# Altium PCB pcb-4layer-1oz-1.6mm.PcbDoc
Units mm, origin at the board's own origin, x right, y up, seen from the top; angles counter-clockwise.
Board outline 50 x 50 mm, 4 copper layers (Top Layer, L2 (GND), L3 (PWR), Bottom Layer), stack 1.506 mm thick; 65 components, 45 nets, 244 pads, 115 vias.
Unrouted connection lines stored in the file: 1.
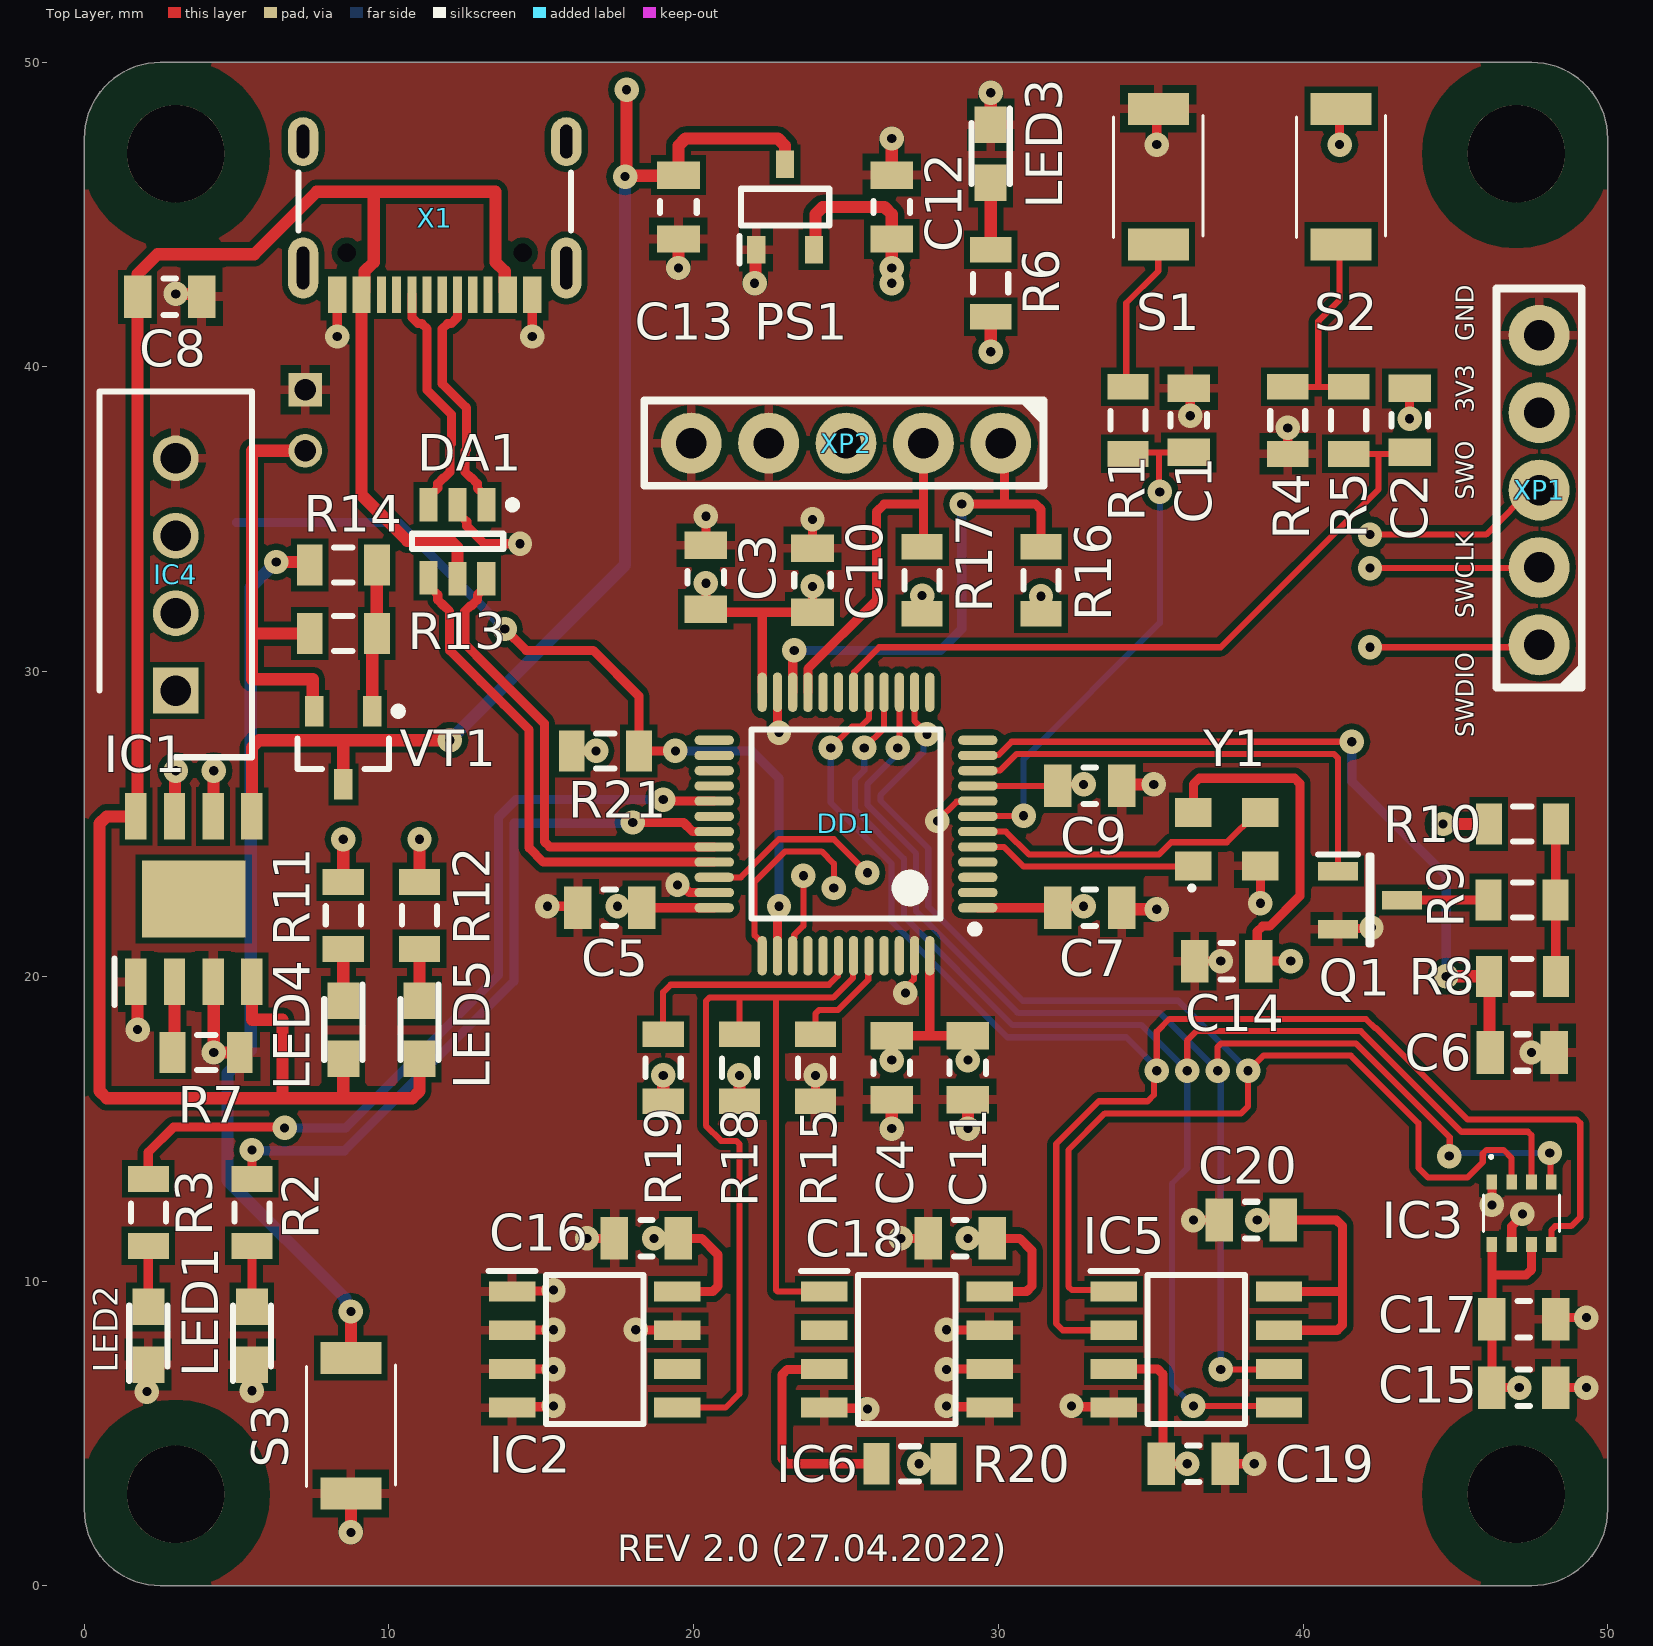
[diagram p0: Top Layer view]
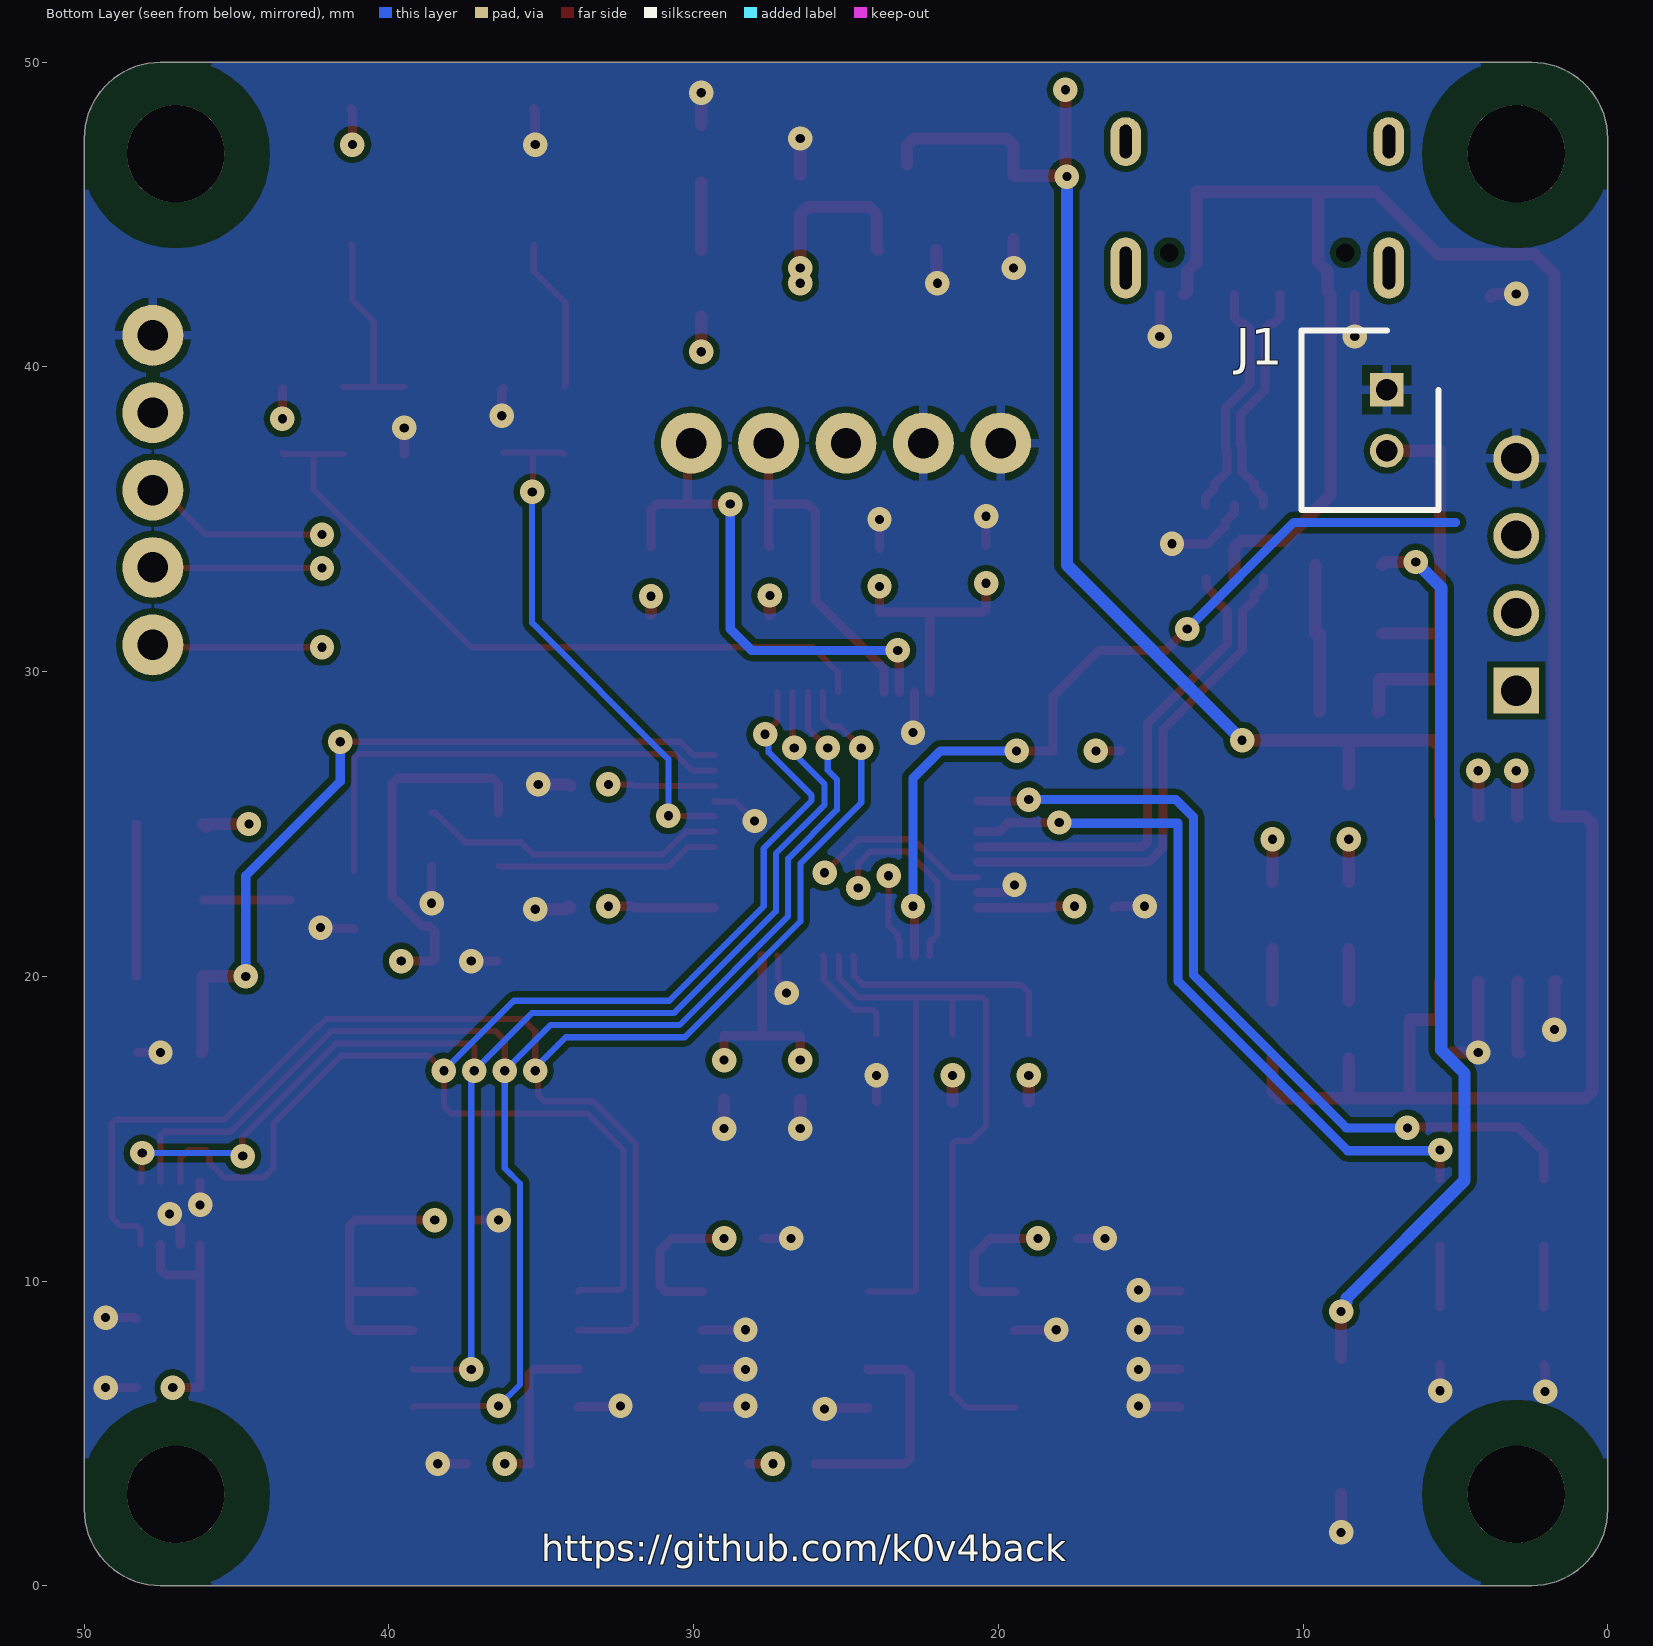
[diagram p1: Bottom Layer view, seen from below]
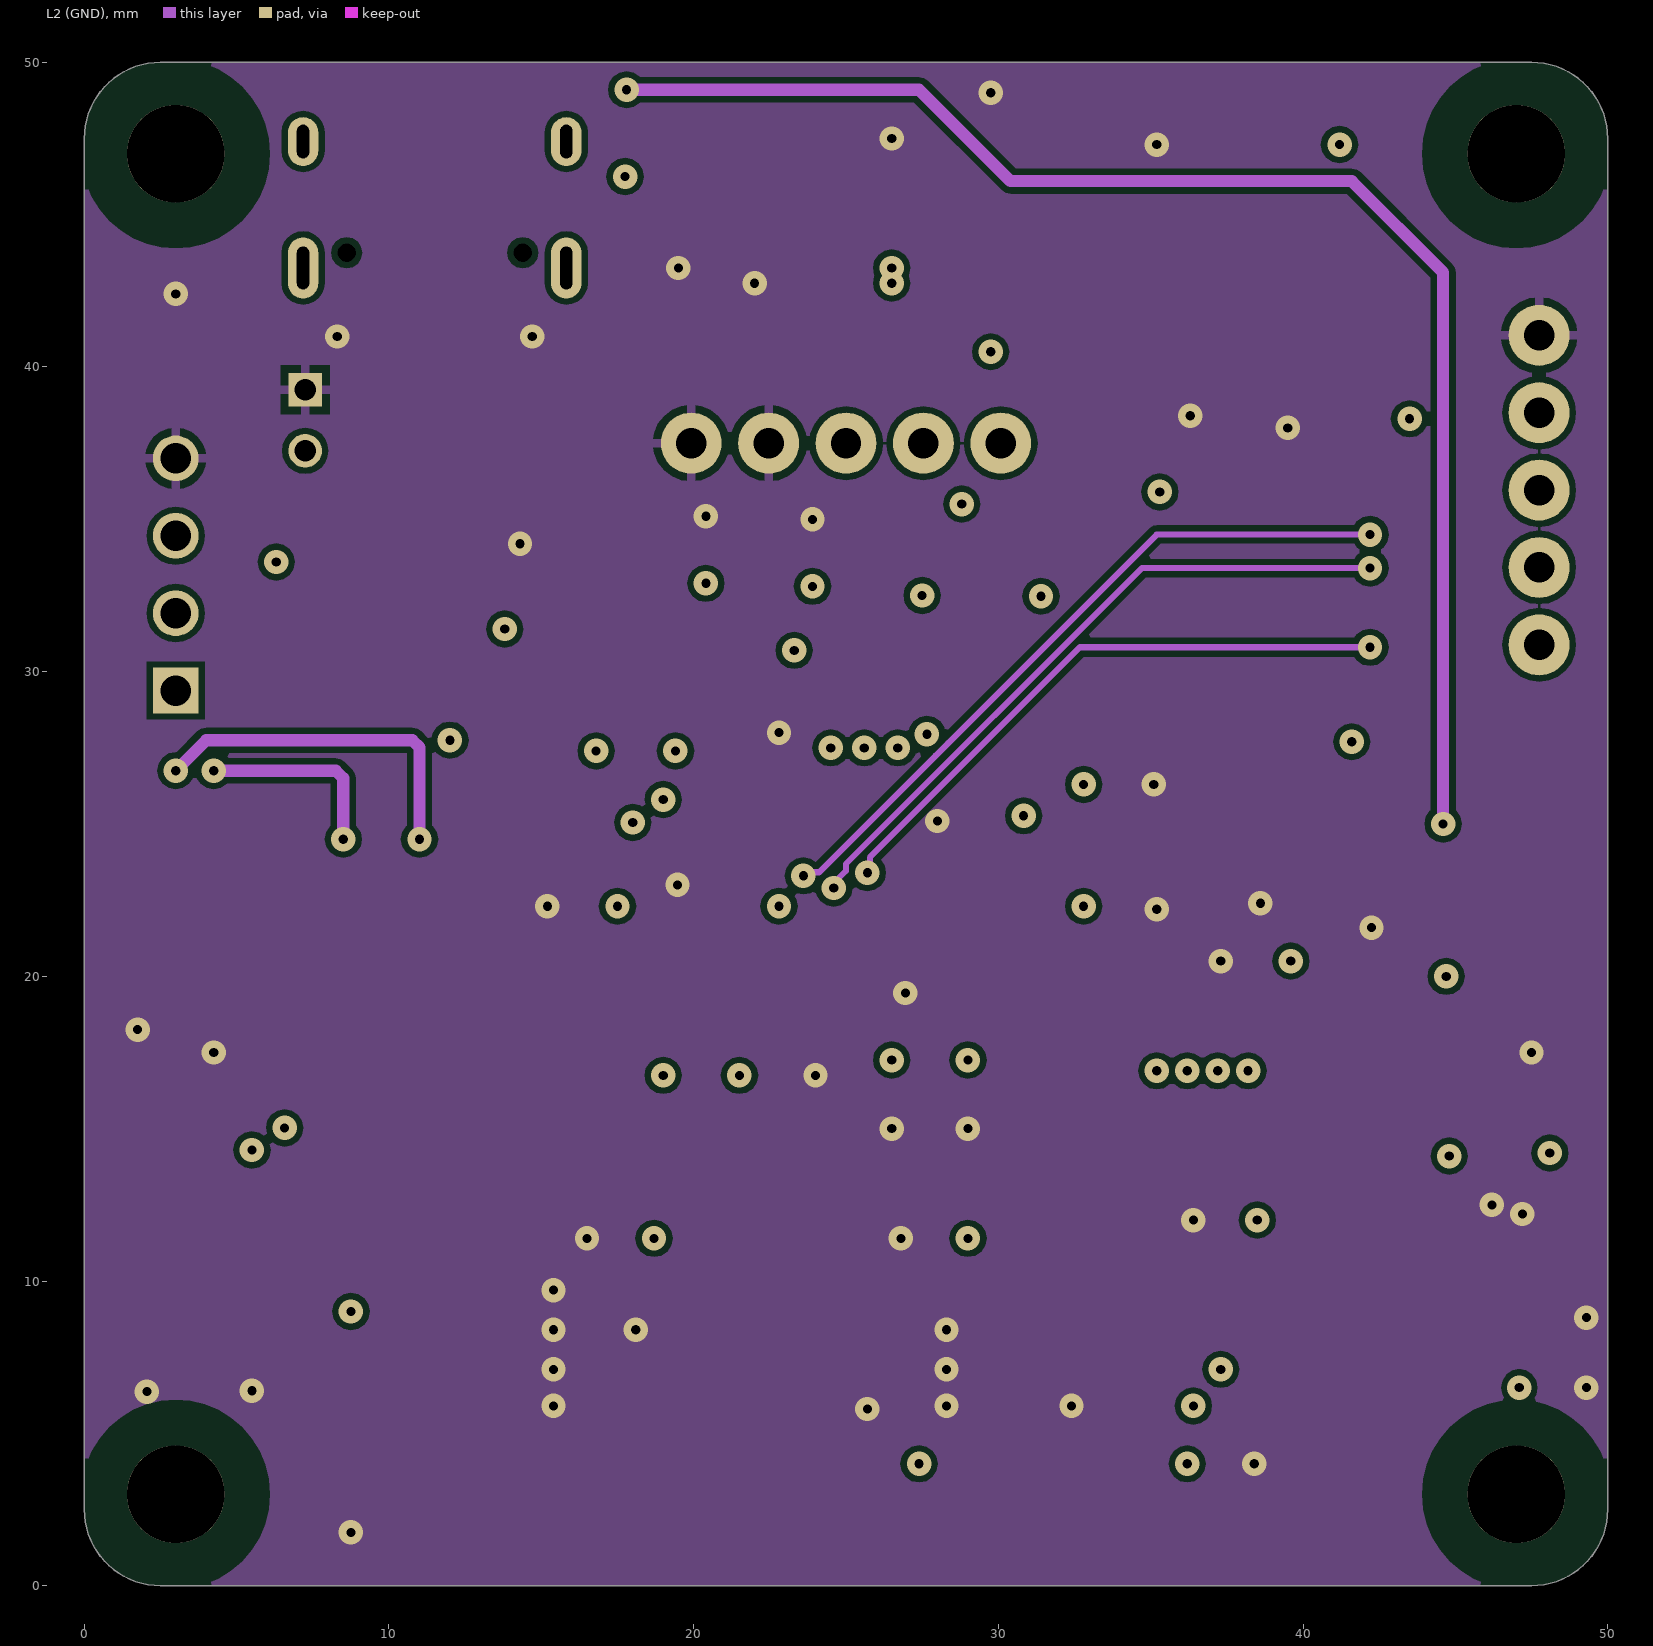
[diagram p2: L2 (GND)]
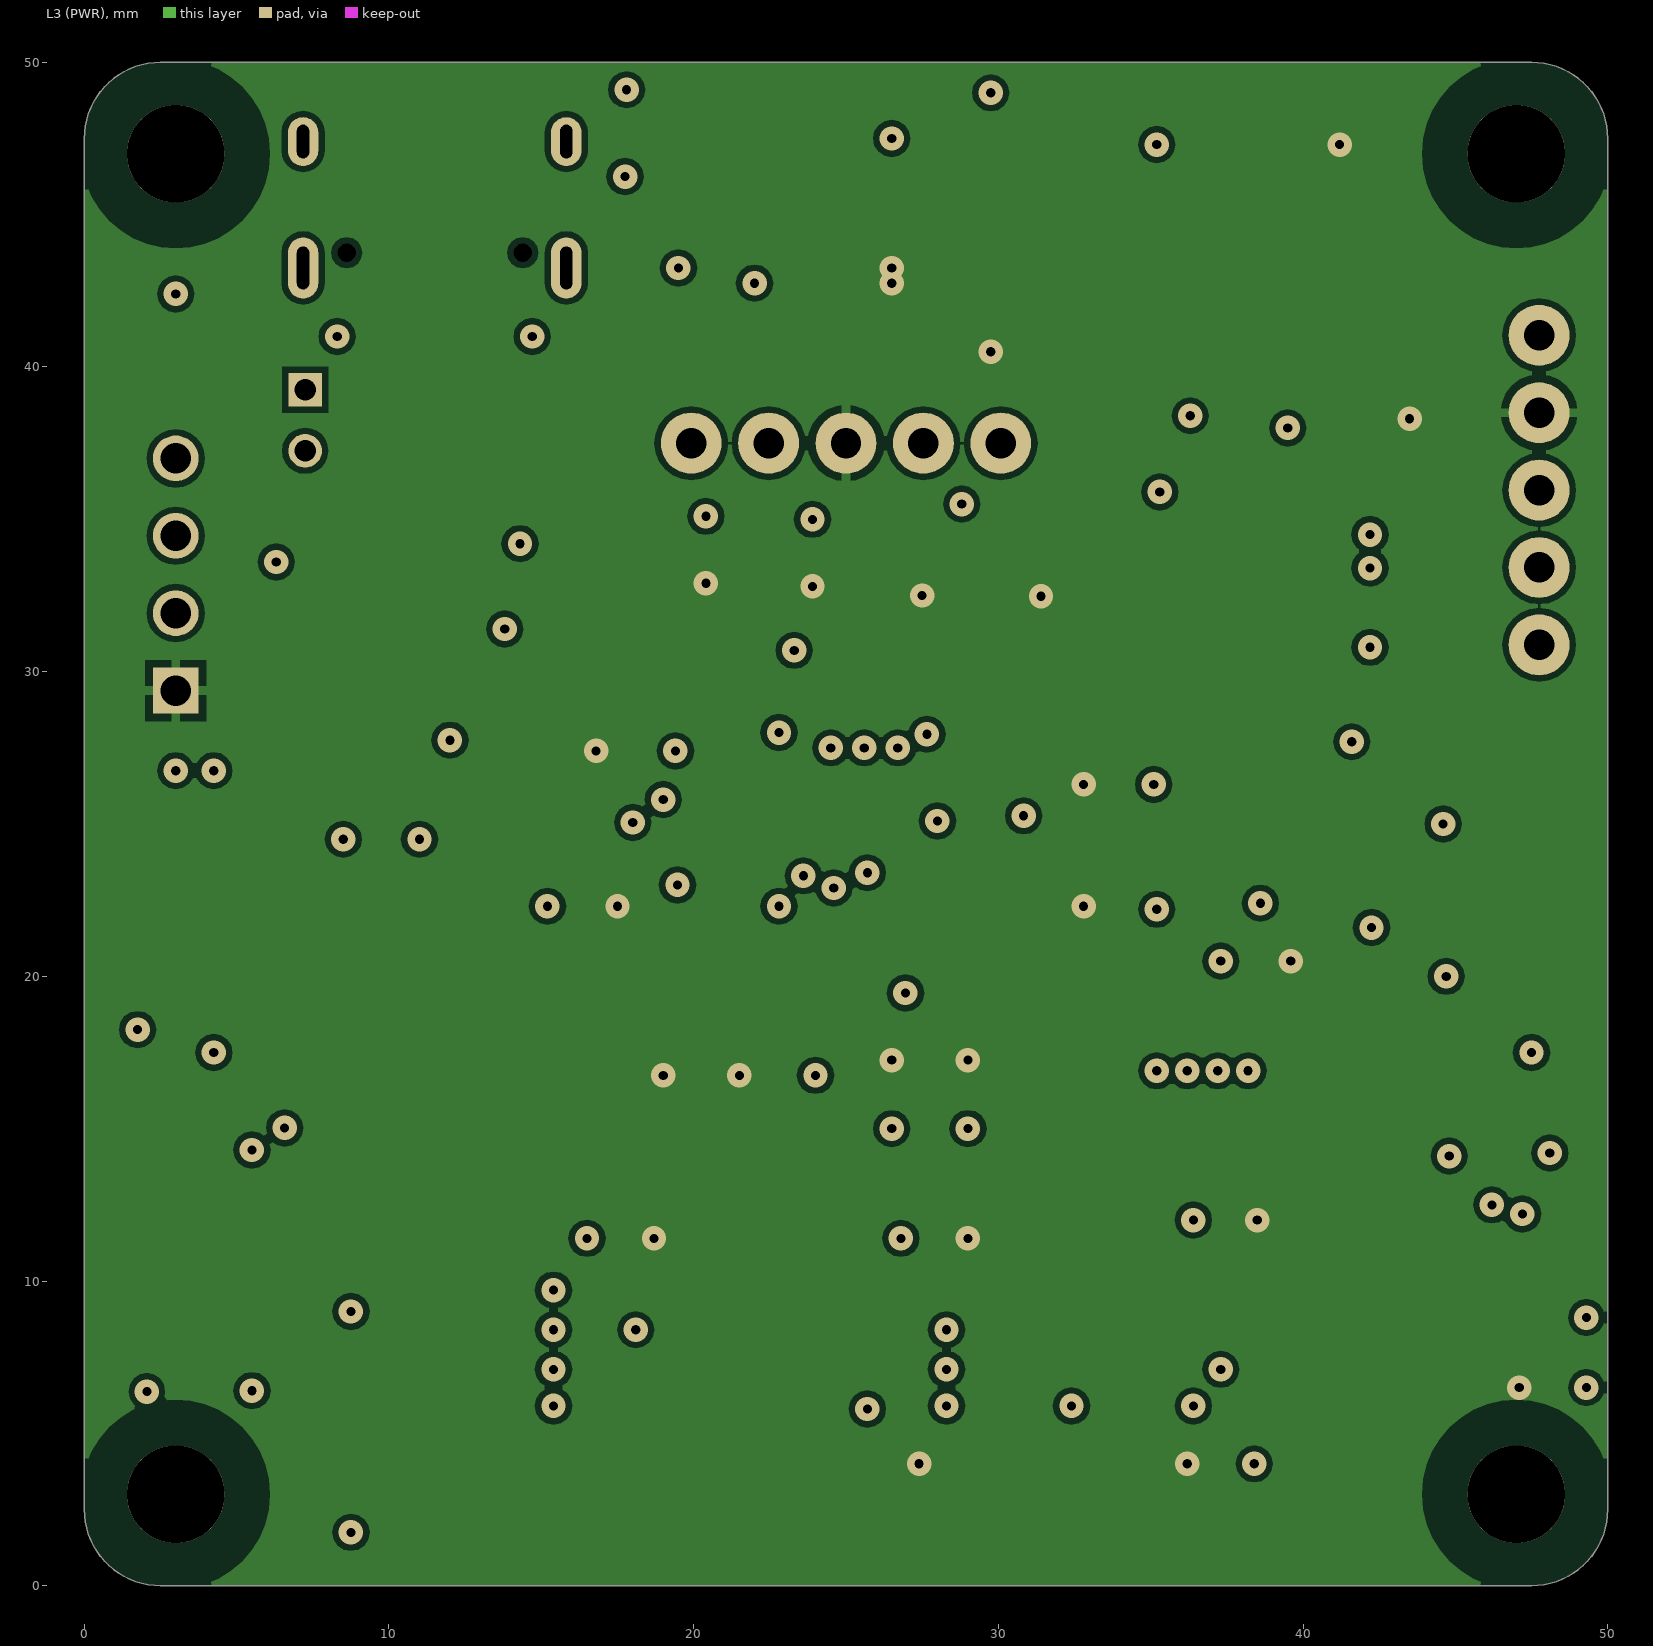
[diagram p3: L3 (PWR)]

## Layer stack, top to bottom
Top Solder: solder mask 0.01, Solder Resist, Dk 3.5
Top Layer: signal copper 0.035
Dielectric 2: prepreg 0.2, PP-006, Dk 4.1
L2 (GND): signal copper 0.0178
Dielectric 1: dielectric 1, FR-4, Dk 4.8
L3 (PWR): signal copper 0.0178
Dielectric 3: prepreg 0.2, PP-006, Dk 4.1
Bottom Layer: signal copper 0.035
Bottom Solder: solder mask 0.01, Solder Resist, Dk 3.5

## Board outline
2.5,0 cw(c2.5,2.5) 0,2.5 0,47.5 cw(c2.5,47.5) 2.5,50 47.5,50 cw(c47.5,47.5) 50,47.5 50,2.5 cw(c47.5,2.5) 47.5,0

## Design rules (kind name [scope] priority, off if disabled: settings)
Clearance Clearance_MH [IsPad and (not PadIsPlated) and (not InAnyComponent)] p1: gap=1.5 ignorepadtopadclearanceinfootprint=FALSE
Clearance [All] p2: gap=0.2 ignorepadtopadclearanceinfootprint=FALSE
DiffPairsRouting [All] p1: maxlimit=0.254 minlimit=0.2 mostfreqgap=0.254 toplayer_maxgap=0.2 toplayer_prefgap=0.2 toplayer_minwidth=0.3 toplayer_maxwidth=0.3 toplayer_prefwidth=0.3 bottomlayer_maxgap=0.2 bottomlayer_prefgap=0.2 bottomlayer_minwidth=0.3 bottomlayer_maxwidth=0.3 bottomlayer_prefwidth=0.3 impedanceprofiledriven=TRUE impedanceprofileid={7B1C8558-1568-4EE4-90A3-14166FB62CFF} impedanceprofilevalue=90.000000 maxuncoupledlength=12.7
HoleSize HoleSize_PWR [All] p1: absolutevalues=TRUE maxlimit=999 minlimit=0.5 maxpercent=80.000 minpercent=20.000
HoleSize [All] p2: absolutevalues=TRUE maxlimit=999 minlimit=0.3 maxpercent=80.000 minpercent=20.000
HoleToHoleClearance [All] p1: gap=0.2 allowstackedmicrovias=TRUE
MinimumSolderMaskSliver [All] p1: minsoldermaskwidth=0.2
PlaneConnect PlaneConnect_PWR [IsVia] p1: planeconnectstyle=Direct reliefexpansion=0.508 reliefentries=4 reliefconductorwidth=0.254 reliefairgap=0.254
PlaneConnect [All] p2: planeconnectstyle=Relief reliefexpansion=0.5 reliefentries=4 reliefconductorwidth=0.5 reliefairgap=0.3
PolygonConnect PolygonConnect_Via [IsVia] p1: connectstyle=Direct reliefconductorwidth=0.254 reliefentries=4 polygonreliefangle="90 Angle" airgapwidth=0.254
PolygonConnect [All] p2: connectstyle=Relief reliefconductorwidth=0.3 reliefentries=4 polygonreliefangle="90 Angle" airgapwidth=0.25
RoomDefinition Main [InComponentClass('Main')] p1: confinementstyle=ConfineIn formatcopy=TRUE lockcomponents=FALSE outline 101.1,53.5 193.1,53.5 193.1,70.5 101.1,70.5
RoomDefinition B4 [InComponentClass('B4')] p2: confinementstyle=ConfineIn formatcopy=TRUE lockcomponents=FALSE outline 101,46 106,46 106,53 101,53
RoomDefinition B3 [InComponentClass('B3')] p3: confinementstyle=ConfineIn formatcopy=TRUE lockcomponents=FALSE outline 79,29.1 171,29.1 171,46.1 79,46.1
RoomDefinition B2 [InComponentClass('B2')] p4: confinementstyle=ConfineIn formatcopy=TRUE lockcomponents=FALSE outline 101,16.5 261.499,16.5 261.499,27.5 101,27.5
RoomDefinition B1 [InComponentClass('B1')] p5: confinementstyle=ConfineIn formatcopy=TRUE lockcomponents=FALSE outline 101.5,-15 137,-15 137,15.5 101.5,15.5
RoutingVias [All] p1: holewidth=0.3 width=0.8 viastyle="Through Hole" minholewidth=0.3 minwidth=0.8 maxholewidth=0.3 maxwidth=0.8
RoutingVias RoutingVias_PWR [All] p2: holewidth=0.5 width=1 viastyle="Through Hole" minholewidth=0.5 minwidth=1 maxholewidth=0.5 maxwidth=1
SilkToSolderMaskClearance [IsPad vs IsVia] p1: minsilkscreentomaskgap=0.254 clearancetoexposedcopper=TRUE
SolderMaskExpansion SolderMaskExpansion_Via [IsVia and not InAnyComponent] p1: expansion=0.102 istentingtop=TRUE
SolderMaskExpansion [All] p2: expansion=0 istentingtop=FALSE
Width [All] p1: maxlimit=0.4 minlimit=0.2 preferedwidth=0.3
24 further rules are at their usual default settings.

## Classes and differential pairs
net class PWR: 3V3 5V ADC1_IN1 ADC_UP BAT BAT_OUT GND NetIC1_2 NetIC1_6 NetIC1_7 NetIC1_9 NetIC6_3 NetLED4_1 NetLED5_1 NetQ1_3 NetR8_1 NetR13_1 NetR14_1 NetVT2_1
component class Main: C1 C2 J1 LED1 LED2 LED3 R1 R2 R3 R4 R5 R6 S1 S2 X1 XP1 XP2
component class B4: DA1
component class B3: C15 C16 C17 C18 C19 C20 IC2 IC3 IC4 IC5 IC6 R16 R17 R18 R19 R20 R21
component class B2: C3 C4 C5 C6 C7 C8 C9 C10 C11 C12 C13 IC1 LED4 LED5 PS1 Q1 R7 R8 R9 R10 R11 R12 R13 R14 S3 VT1
component class B1: C14 DD1 R15 Y1
differential pair USB_OUT: +USB_OUT_P -USB_OUT_N
differential pair USB_IN: +USB_IN_P -USB_IN_N

## Components (designator, comment, footprint, x,y, rotation, side; value= is the part's Value field where it differs from the comment)
C1 "0.1 uF" C_0805 36.25,38.25 r270 top value=100nF
C2 "0.1 uF" C_0805 43.5,38.25 r90 top value=100nF
C3 "10 uF" C_0805 20.4,33.1 r270 top value=10mF
C4 "0.1 uF" C_0805 26.5,17 r90 top value=100nF
C5 "10 uF" C_0805 17.25,22.25 r0 top value=10mF
C6 "1 uF" C_0805 47.2,17.5 r180 top value=100nF
C7 "0.1 uF" C_0805 33,22.25 r180 top value=100nF
C8 "10 uF" C_0805 2.8,42.3 r180 top
C9 "0.1 uF" C_0805 33,26.25 r180 top value=100nF
C10 "0.1 uF" C_0805 23.9,33 r270 top value=100nF
C11 "0.1 uF" C_0805 29,17 r90 top value=100nF
C12 "10 uF" C_0805 26.5,45.25 r90 top
C13 "10 uF" C_0805 19.5,45.25 r270 top
C14 "0.1 uF" C_0805 37.5,20.5 r0 top value=1mF
C15 "1 uF" C_0805 47.25,6.5 r180 top value=1mF
C16 "1mF" C_0805 18.45,11.4 r0 top
C17 "0.1 uF" C_0805 47.25,8.75 r180 top value=1mF
C18 "22 uF" C_0805 28.75,11.4 r0 top value=22mF
C19 "1mF" C_0805 36.4,4 r180 top
C20 "1mF" C_0805 38.3,12 r0 top
DA1 "USBLC6-2SC6" SOT-23-6 12.25,34.25 r270 top
DD1 "STM32f103c8t6" LQFP48 25,25 r180 top
IC1 "TP4056A" SOIC127P600X175-9N 3.595,22.538 r90 top
IC2 "24LC32A-I_SN" SOIC127P600X175-8N 16.75,7.75 r0 top
IC3 "MOD-BME280" MODBME280 47.175,12.225 r90 top
IC4 "DH11" HDRV4W80P0X254_1X4_1200X500X1550P 3,29.38 r90 top
IC5 "W25X40CLSNIG" SOIC127P600X175-8N 36.5,7.75 r0 top
IC6 "LM75AD,118" SOIC127P600X175-8N 27,7.75 r0 top
J1 "B2B-PH-K-S_LF__SN_" SHDR2W50P0X200_1X2_590X450X600P 7.25,39.25 r90 bottom
LED1 "150080GS75000" LEDM2012X80N 5.5,8.2 r90 top
LED2 "150080GS75000" LEDM2012X80N 2.1,8.2 r90 top
LED3 "150080GS75000" LEDM2012X80N 29.75,47 r270 top
LED4 "150080GS75000" LEDM2012X80N 8.5,18.25 r270 top
LED5 "150080GS75000" LEDM2012X80N 11,18.25 r270 top
PS1 "XC6206P182MR" SOT95P280X130-3N 23,45.25 r90 top
Q1 "IRLML2502TRPBF" SOT95P237X112-3N 42.2,22.5 r0 top
R1 "10 kOm" R_0805 34.25,38.25 r90 top
R2 "2 kOm" R_0805 5.501,12.25 r270 top value="510 Om"
R3 "2 kOm" R_0805 2.101,12.25 r270 top value="510 Om"
R4 "100 kOm" R_0805 39.5,38.25 r270 top value="10 kOm"
R5 "10 kOm" R_0805 41.5,38.25 r90 top
R6 "2 kOm" R_0805 29.75,42.75 r90 top
R7 "1 кOm" R_0805 4,17.5 r0 top
R8 "100 Om" R_0805 47.2,20 r180 top value="47 kOm"
R9 "110 kOm" R_0805 47.192,22.5 r0 top value="10 kOm"
R10 "30 kOm" R_0805 47.2,25 r180 top value="510 kOm"
R11 "1 кOm" R_0805 8.5,22 r90 top
R12 "1 кOm" R_0805 11,22 r90 top
R13 "100 kOm" R_0805 8.5,31.25 r180 top value="10 kOm"
R14 "10 kOm" R_0805 8.5,33.5 r0 top
R15 "10 kOm" R_0805 24,17 r90 top
R16 "10 kOm" R_0805 31.4,33 r90 top
R17 "10 kOm" R_0805 27.5,33 r90 top
R18 "10 kOm" R_0805 21.5,17 r90 top
R19 "10 kOm" R_0805 19,17 r90 top
R20 "10 kOm" R_0805 27.1,4 r180 top
R21 "10 kOm" R_0805 17.1,27.4 r0 top
S1 "TS-1088R-02026" TS1088R02026 35.25,46.25 r270 top
S2 "TS-1088R-02026" TS1088R02026 41.25,46.25 r90 top
S3 "TS-1088R-02026" TS1088R02026 8.75,5.25 r270 top
VT1 "IRLML5203TRPBF" SOT23 8.5,27.5 r270 top
X1 "USB Type C, 3A" "CON: TYPE-C-31-M-12" 11.5,43.75 r0 top
XP1 "PBS-5" PBS-5 47.75,30.88 r90 top
XP2 "PBS-5" PBS-5 30.08,37.5 r180 top
Y1 "S3D8.000000B20F30T" S3D8000000B20F30T 37.5,24.5 r0 top

## Footprints (in the part's own frame and the unit in brackets; to place one, negate y for a bottom-side part, rotate by r counter-clockwise, add the part's x,y. Pads: shape width x height; smd on the part's side, far side on the other; paste and mask are expansions set on the pad)
C_0805 [mm] "Chip Capacitor, 2-Leads, Body 2,00x1,25mm, IPC Medium Density"
  rect 0.9x1.4 smd: 1(-1.05,0) 2(1.05,0)
  silkscreen extent -0.2,-0.6 0.2,0.6, body extent -1,-0.62 1,0.63, height 0.8
"CON: TYPE-C-31-M-12" [mm]
  rect 0.6x1.2 smd mask+0.075: A1(3.2,-1.375) A4(2.4,-1.375) B1(-3.2,-1.375) B4(-2.4,-1.375)
  rect 0.3x1.2 smd mask+0.075: A5(1.25,-1.375) A6(0.25,-1.375) A7(-0.25,-1.375) A8(-1.25,-1.375) B5(-1.75,-1.375) B6(-0.75,-1.375) B7(0.75,-1.375) B8(1.75,-1.375)
  oval 1x2 hole 0.4 slot 1.4 at 90 deg mask+0.075: MH(-4.32,-0.5) MH(4.32,-0.5)
  oval 1x1.6 hole 0.4 slot 1.1 at 90 deg mask+0.075: MH(-4.32,3.65) MH(4.32,3.65)
  round 0 hole 0.6 mask+0.075: MH(-2.89,0) MH(2.89,0)
  silkscreen extent -4.47,0.72 4.47,2.63, body extent -4.48,-1.48 4.48,6.28, height 3.26
HDRV4W80P0X254_1X4_1200X500X1550P [mm]
  rect 1.5x1.5 hole 1: 1(0,0)
  round 1.5 hole 1: 2(2.54,0) 3(5.08,0) 4(7.62,0)
  silkscreen extent -2.19,-2.5 9.81,2.5
LEDM2012X80N [mm]
  rect 1.2x1.05 smd: 1(-0.95,0) 2(0.95,0)
  silkscreen extent -1.48,-0.63 1,0.63, body extent -1,-0.63 1,0.63, height 0.7
LQFP48 [mm] "TSQFP, 48-Leads, Body 7,00x7,00mm, Pitch 0,50mm, IPC Medium Density"
  oval 1.3x0.3 smd: 1(-4.325,2.75) 2(-4.325,2.25) 3(-4.325,1.75) 4(-4.325,1.25) 5(-4.325,0.75) 6(-4.325,0.25) 7(-4.325,-0.25) 8(-4.325,-0.75) 9(-4.325,-1.25) 10(-4.325,-1.75) 11(-4.325,-2.25) 12(-4.325,-2.75) 25(4.325,-2.75) 26(4.325,-2.25) 27(4.325,-1.75) 28(4.325,-1.25) 29(4.325,-0.75) 30(4.325,-0.25) 31(4.325,0.25) 32(4.325,0.75) 33(4.325,1.25) 34(4.325,1.75) 35(4.325,2.25) 36(4.325,2.75)
  oval 0.3x1.3 smd: 13(-2.75,-4.325) 14(-2.25,-4.325) 15(-1.75,-4.325) 16(-1.25,-4.325) 17(-0.75,-4.325) 18(-0.25,-4.325) 19(0.25,-4.325) 20(0.75,-4.325) 21(1.25,-4.325) 22(1.75,-4.325) 23(2.25,-4.325) 24(2.75,-4.325) 37(2.75,4.325) 38(2.25,4.325) 39(1.75,4.325) 40(1.25,4.325) 41(0.75,4.325) 42(0.25,4.325) 43(-0.25,4.325) 44(-0.75,4.325) 45(-1.25,4.325) 46(-1.75,4.325) 47(-2.25,4.325) 48(-2.75,4.325)
  silkscreen extent -4.35,-3.1 3.1,3.57, body extent -4.53,-4.53 4.47,4.47, height 1.5
MODBME280 [mm]
  rect 0.5x0.35 smd: 1(1.025,0.975) 2(1.025,0.325) 3(1.025,-0.325) 4(1.025,-0.975) 5(-1.025,-0.975) 6(-1.025,-0.325) 7(-1.025,0.325) 8(-1.025,0.975)
  silkscreen extent -0.6,-1.25 1.9,1.25, body extent -1.25,-1.25 1.25,1.25, height 0.93
PBS-5 [mm]
  round 2 hole 1: 1(0,0) 2(2.54,0) 3(5.08,0) 4(7.62,0) 5(10.16,0)
  silkscreen extent -1.4,-1.4 11.7,1.4, body extent -1.27,-1.27 11.43,1.27, height 8.5
R_0805 [mm] "Chip Resistor, 2-Leads, Body 2,10x1,30mm, IPC Medium Density"
  rect 0.85x1.35 smd: 1(-1.1,0) 2(1.1,0)
  silkscreen extent -0.3,-0.58 0.3,0.58, body extent -1.2,-0.62 1.2,0.63, height 0.55
S3D8000000B20F30T [mm]
  rect 1.2x0.95 smd: 1(-1.1,-0.875) 2(1.1,-0.875) 3(1.1,0.875) 4(-1.1,0.875)
  silkscreen extent -1.2,-1.65 -1.1,-1.55, body extent -1.61,-1.25 1.61,1.25, height 1.1
SHDR2W50P0X200_1X2_590X450X600P [mm]
  rect 1.1x1.1 hole 0.7: 1(0,0)
  round 1.1 hole 0.7: 2(-2,0)
  silkscreen extent -3.95,-1.7 1.95,2.8, body extent -3.95,-2.25 1.95,2.25, height 6
SOIC127P600X175-8N [mm]
  rect 1.525x0.65 smd: 1(-2.712,1.905) 2(-2.712,0.635) 3(-2.712,-0.635) 4(-2.712,-1.905) 5(2.712,-1.905) 6(2.712,-0.635) 7(2.712,0.635) 8(2.712,1.905)
  silkscreen extent -3.47,-2.45 1.6,2.58, body extent -3,-2.45 3,2.45, height 1.75
SOIC127P600X175-9N [mm]
  rect 1.525x0.7 smd: 1(-2.712,1.905) 2(-2.712,0.635) 3(-2.712,-0.635) 4(-2.712,-1.905) 5(2.712,-1.905) 6(2.712,-0.635) 7(2.712,0.635) 8(2.712,1.905)
  rect 2.513x3.402 smd: 9(0,0)
  silkscreen extent -3.47,2.61 -1.95,2.61, body extent -3,-2.45 3,2.45, height 1.75
SOT23 [mm] "SOT23, 3-Leads, Body 2,90x2,45mm, Pitch 0,95mm, IPC Medium Density"
  rect 1x0.6 smd: 1(-1.2,0.95) 2(-1.2,-0.95) 3(1.2,0)
  silkscreen extent -1.32,-1.5 0.7,1.93, body extent -1.05,-1.5 1.45,1.5, height 1.05
SOT95P237X112-3N [mm]
  rect 1.3x0.6 smd: 1(-1.05,0.95) 2(-1.05,-0.95) 3(1.05,0)
  silkscreen extent -1.7,-1.46 0.05,1.5, body extent -1.18,-1.46 1.18,1.46, height 1.12
SOT95P280X130-3N [mm]
  rect 0.9x0.6 smd: 1(-1.4,0.95) 2(-1.4,-0.95) 3(1.4,0)
  silkscreen extent -1.85,-1.45 0.6,1.5, body extent -1.4,-1.45 1.4,1.45, height 1.3
SOT-23-6 [mm] "SOT23, 6-Leads, Body 1,60x1,60mm, Pitch 0,50mm, IPC Medium Density"
  rect 1.1x0.6 smd: 1(-1.225,0.95) 2(-1.225,0) 3(-1.225,-0.95) 4(1.175,-0.95) 5(1.194,0) 6(1.194,0.94)
  silkscreen extent -1.35,-1.5 0.22,1.93, body extent -1.52,-1.56 1.48,1.49, height 1.4
TS1088R02026 [mm]
  rect 1.05x2 smd: 1(-2.225,0) 2(2.225,0)
  silkscreen extent -2,-1.47 2,1.47, body extent -2.65,-1.47 2.65,1.47, height 2.3

## Part data
C1 C2 C3 C4 C5 C6 C7 C8 C9 C10 C11 C12 C13 C14 C15 C16 C17 C18 C19 C20: library part C_0805
IC1: "Integrated Circuit", Manufacturer_Name=ams, Datasheet Link=https://www.naylampmechatronics.com/img/cms/Datasheets/TC4056A-AMS.pdf, Height=1.75mm, Manufacturer_Part_Number=TP4056A
IC2: "Integrated Circuit", Arrow Part Number=24LC32A-I/SN, Manufacturer_Name=Microchip, Mouser Part Number=579-24LC32A-I/SN, Arrow Price/Stock=https://www.arrow.com/en/products/24lc32a-isn/microchip-technology, Datasheet Link=http://ww1.microchip.com/downloads/en/DeviceDoc/21713M.pdf, Height=1.75mm, Manufacturer_Part_Number=24LC32A-I/SN, Mouser Price/Stock=https://www.mouser.co.uk/ProductDetail/Microchip-Technology/24LC32A-I-SN?qs=KwArPi4cUogiVlLk9E3nOw%3D%3D
IC3: "Integrated Circuit", Manufacturer_Name="Olimex Ltd.", Mouser Part Number=909-MOD-BME280, Datasheet Link=https://eu.mouser.com/datasheet/2/306/BME280-1620794.pdf, Height=1mm, Manufacturer_Part_Number=MOD-BME280, Mouser Price/Stock=https://www.mouser.co.uk/ProductDetail/Olimex-Ltd/MOD-BME280?qs=%252B6g0mu59x7K82sEO3yPPgg%3D%3D
IC4: library part 101020011, "Integrated Circuit", Manufacturer_Name="Seeed Studio", Mouser Part Number=713-101020011, Arrow Part Number=101020011, Arrow Price/Stock=https://www.arrow.com/en/products/101020011/seeed-technology-limited, Datasheet Link=https://componentsearchengine.com/Datasheets/1/101020011.pdf, Height=15.5mm, Manufacturer_Part_Number=101020011, Mouser Price/Stock=https://www.mouser.co.uk/ProductDetail/Seeed-Studio/101020011?qs=1%252B9yuXKSi8Dq%252B99bte6U5Q%3D%3D
IC5: "Integrated Circuit", Manufacturer_Name=Winbond, Mouser Part Number=454-W25X40CLSNIG, Arrow Part Number=W25X40CLSNIG, Arrow Price/Stock=https://www.arrow.com/en/products/w25x40clsnig/winbond-electronics?region=nac, Datasheet Link="https://www.winbond.com/resource-files/w25x40cl_f 20140325.pdf", Height=1.75mm, Manufacturer_Part_Number=W25X40CLSNIG, Mouser Price/Stock=https://www.mouser.co.uk/ProductDetail/Winbond/W25X40CLSNIG?qs=qSfuJ%252Bfl%2Fd6X%252Bb%2FMViqBBg%3D%3D
IC6: "Integrated Circuit", Manufacturer_Name=NXP, Mouser Part Number=771-LM75AD-T, Arrow Part Number=LM75AD,118, Arrow Price/Stock=https://www.arrow.com/en/products/lm75ad118/nxp-semiconductors?region=nac, Datasheet Link=http://www.nxp.com/docs/en/data-sheet/LM75A.pdf, Height=1.75mm, Manufacturer_Part_Number=LM75AD,118, Mouser Price/Stock=https://www.mouser.co.uk/ProductDetail/NXP-Semiconductors/LM75AD118?qs=LOCUfHb8d9tvtApDiOTqqg%3D%3D
J1: "Connector", Arrow Part Number=B2B-PH-K-S(LF)(SN), Manufacturer_Name="JST (JAPAN SOLDERLESS TERMINALS)", Arrow Price/Stock=https://www.arrow.com/en/products/b2b-ph-k-s-lf-sn/jst-manufacturing, Datasheet Link=https://datasheet.lcsc.com/szlcsc/JST-Sales-America-B2B-PH-K-S-LF-SN_C131337.pdf, Height=6mm, Manufacturer_Part_Number=B2B-PH-K-S(LF)(SN)
LED1 LED2 LED3 LED4 LED5: "LED", Manufacturer_Name="Wurth Elektronik", Mouser Part Number=710-150080GS75000, Datasheet Link=https://katalog.we-online.com/led/datasheet/150080GS75000.pdf, Height=0.8mm, Manufacturer_Part_Number=150080GS75000, Mouser Price/Stock=https://www.mouser.co.uk/ProductDetail/Wurth-Elektronik/150080GS75000?qs=2kOmHSv6VfQRoTEZVk1mGA%3D%3D
PS1: "Power Supply", Manufacturer_Name=Torex, Datasheet Link=https://componentsearchengine.com/Datasheets/2/XC6206P182MR.pdf, Height=1.3mm, Manufacturer_Part_Number=XC6206P182MR
Q1: "MOSFET (N-Channel)", Manufacturer_Name=Infineon, Mouser Part Number=942-IRLML2502TRPBF, Arrow Part Number=IRLML2502TRPBF, Arrow Price/Stock=https://www.arrow.com/en/products/irlml2502trpbf/infineon-technologies-ag?region=nac, Datasheet Link=http://uk.rs-online.com/web/p/products/1623274, Height=1.12mm, Manufacturer_Part_Number=IRLML2502TRPBF, Mouser Price/Stock=https://www.mouser.co.uk/ProductDetail/Infineon-IR/IRLML2502TRPBF?qs=9%252BKlkBgLFf37zQw9UlZd%2FQ%3D%3D
R1 R2 R3 R4 R5 R6 R7 R8 R9 R10 R11 R12 R13 R14 R15 R16 R17 R18 R19 R20 R21: library part R_0805
S1 S2 S3: "Switch", Manufacturer_Name=XUNPU, Datasheet Link=https://datasheet.lcsc.com/szlcsc/1912111437_XUNPU-TS-1088R-02026_C455280.pdf, Height=2.2mm, Manufacturer_Part_Number=TS-1088R-02026
VT1: "Транзистор, P-канал 30В 3A logic"
X1: library part Connector_USB_Type_C, CurrentMax=3A, Manufacturer="Korean Hroparts", PartNumber=TYPE-C-31-M-12, CommentText="USB type C", HelpURL=https://lcsc.com/product-detail/USB-Type-C_Korean-Hroparts-Elec-TYPE-C-31-M-12_C165948.html, TypeConnector="USB Type C", ValueManufacturerPartNumber="USB Type C, 3A"
Y1: "Crystal or Oscillator", Manufacturer_Name="Shenzhen SCTF Elec", Datasheet Link=https://datasheet.lcsc.com/szlcsc/1904291731_Shenzhen-SCTF-Elec-S3D8-000000B20F30T_C387337.pdf, Height=1mm, Manufacturer_Part_Number=S3D8.000000B20F30T
DA1: HelpURL=https://static.chipdip.ru/lib/093/DOC001093117.pdf

## Free pads (board coordinates)
  round 3.2 hole 3.2 unplated: MH(3,3) MH(3,47) MH(47,3) MH(47,47)

## Via types
v1: diameter 0.8, hole 0.3, Top Layer to Bottom Layer, tented both sides, 115 vias

## Nets (pads, with @x,y where several pads share a name; then routed paths per layer and width w, separated by ;. In a path a pad name is that pad's centre, name@x,y a point inside that pad or via, vN(x,y) a via of type N, cw(c..) or ccw(c..) an arc to the next point about the centre after c; other vN are vias at no path point)
3V3: C2.2 C3.2 C4.2 C5.2 C7.2 C9.2 C10.2 C11.2 C12.1 C14.2 C15.2 C16.2 C17.2 C18.2 C19.2 C20.2 DD1.1 DD1.9 DD1.24 DD1.36 DD1.48 IC2.8 IC3.6 IC3.8 IC4.1 IC5.3 IC5.7 IC5.8 IC6.8 PS1.2 R6.1 R16.1 R17.1 R18.1 R19.1 R20.1 R21.1 S2.2 XP1.4 XP2.3 Y1.4 | length 84.3
  Top Layer w0.2: DD1.9 C9.2 32,26.3 v1(32.8,26.3)
  Top Layer w0.3: R21.1 v1(16.8,27.4) ; v1(17.5,22.3) 18.25,22.3 C5.2 DD1.36 ; v1(18.7,11.4) C16.2 20.26,11.4 20.8,10.86 20.8,9.831 20.624,9.655 IC2.8 ; v1(20.4,32.9) C3.2 20.5,31.95 22.25,31.95 ; DD1.24 22.25,31.95 ; v1(23.9,32.8) C10.2 22.25,31.95 ; v1(26.5,17.25) C4.2 27.75,18.05 ; v1(27.4,4) R20.1 ; DD1.48 27.75,18.05 ; v1(29,11.4) C18.2 30.7,11.4 31.1,11 31.1,9.831 30.924,9.655 IC6.8 ; v1(29,17.25) C11.2 27.75,18.05 ; DD1.1 C7.2 32,22.3 v1(32.8,22.3) ; IC5.3 35.224,7.115 35.4,6.939 35.4,4.05 C19.2 v1(36.2,4) ; Y1.4 36.4,26.3 36.6,26.5 39.724,26.5 39.9,26.324 39.9,22.639 38.911,21.65 38.676,21.65 38.5,21.474 38.5,20.55 C14.2 v1(39.6,20.5) ; v1(38.5,12) C20.2 41.1,12 41.3,11.8 41.3,9.7 ; IC5.7 41.124,8.385 41.3,8.561 41.3,9.7 ; IC5.8 41.255,9.655 41.3,9.7 ; v1(41.2,47.3) 41.2,48.425 S2.2 ; v1(43.5,38.3) C2.2 ; IC3.8 46.2,10.2 ; v1(47.1,6.5) C15.2 C17.2 46.2,10.2 ; IC3.6 47.5,10.376 47.324,10.2 46.2,10.2
  Top Layer w0.4: R19.1 v1(19,16.75) ; R18.1 v1(21.5,16.75) ; PS1.2 24,43.9 24,45.016 24.234,45.25 26.266,45.25 26.5,45.016 C12.1 v1(26.5,43.25) v1(26.5,42.75) ; R17.1 v1(27.5,32.5) ; v1(29.75,40.5) R6.1 ; R16.1 v1(31.4,32.475)
5V: C8.2 DA1.5 IC1.4 IC1.8 LED4.2 LED5.2 X1.A4 X1.B4 | length 77.2
  Top Layer w0.4: IC1.4 5.5,18.575 6.5,18.575 6.5,16 ; LED4.2 8.5,16 ; LED5.2 11,16.234 10.766,16 8.5,16 ; DA1.5 12.25,34.066 12.016,34.3 10.6,34.3 9.1,35.8 X1.B4 9.2,42.475 9.2,43.009 9.2,43.141 9.5,43.441 9.5,45.75 ; X1.A4 13.8,42.475 13.8,43.009 13.8,43.141 13.5,43.441 13.5,45.75 9.5,45.75 ; 6.5,16 0.734,16 0.5,16.234 0.5,25.016 0.734,25.25 IC1.8 1.75,25.31 C8.2 1.75,43.05 2.4,43.7 5.575,43.7 7.625,45.75 9.5,45.75 ; 6.5,16 8.5,16
ADC1_IN1: C6.2 DD1.11 R8.2 | length 25.4
  Top Layer w0.2: DD1.11 29.344,27.269 30.006,27.269 30.437,27.7 v1(41.6,27.7)
  Top Layer w0.4: v1(44.7,20) R8.2 46.125,19.975 46.125,17.525 C6.2
  Bottom Layer w0.3: v1(41.6,27.7) 41.6,26.4 44.7,23.3 v1(44.7,20)
ADC_UP: DD1.10 Q1.1 | length 15.8
  Top Layer w0.2: DD1.10 30.053,26.75 30.603,27.3 41.01,27.3 41.15,27.16 Q1.1
BAT: J1.2 R13.2 VT1.2 | length 14.3
  Top Layer w0.4: J1.2 5.5,37.25 5.5,31.25 ; R13.2 5.5,31.25 ; VT1.2 7.5,28.7 7.5,29.75 5.5,29.75 5.5,31.25
BAT_OUT: C13.1 IC1.5 PS1.3 R10.2 VT1.3 | length 90
  Top Layer w0.4: IC1.5 5.5,27.516 5.734,27.75 8.5,27.75 ; VT1.3 8.5,27.75 ; v1(12,27.75) 8.5,27.75 ; v1(17.75,46.25) v1@17.775,46.275 ; v1(17.8,49.1) 17.8,46.3 v1@17.775,46.275 ; PS1.3 23,47.266 22.766,47.5 19.734,47.5 19.5,47.266 C13.1 19.475,46.275 v1@17.775,46.275 ; v1(44.6,25) 45.9,25 46,24.9 R10.2
  L2 (GND) w0.4: v1(17.8,49.1) 27.4,49.1 30.4,46.1 41.6,46.1 44.6,43.1 v1(44.6,25)
  Bottom Layer w0.4: v1(12,27.75) 17.75,33.5 v1(17.75,46.25)
BUTTON1: C2.1 DD1.18 R5.1 | length 23.5
  Top Layer w0.2: DD1.18 25.269,29.344 25.269,29.981 26.089,30.8 37.3,30.8 42.475,35.975 42.475,37.15 ; R5.1 42.475,37.15 ; C2.1 43.45,37.15 42.475,37.15
DHT11_DATA: DD1.38 R21.2 | length 28.2
  Top Layer w0.3: v1(13.8,31.4) 14.5,30.7 16.7,30.7 18.2,29.2 R21.2 v1(19.4,27.4) ; DD1.38 22.75,22.25 v1(22.8,22.3)
  Bottom Layer w0.3: 5,34.9 10.3,34.9 v1(13.8,31.4) ; v1(19.4,27.4) 21.9,27.4 22.8,26.5 v1(22.8,22.3)
GND: C1.1 C3.1 C4.1 C5.1 C6.1 C7.1 C8.1 C9.1 C10.1 C11.1 C12.2 C13.2 C14.1 C15.1 C16.1 C17.1 C18.1 C19.1 C20.1 DA1.2 DD1.8 DD1.23 DD1.35 DD1.47 IC1.1 IC1.3 IC2.1 IC2.2 IC2.3 IC2.4 IC2.7 IC3.1 IC3.7 IC4.4 IC5.4 IC6.4 IC6.5 IC6.6 IC6.7 J1.1 LED1.1 LED2.1 LED3.1 PS1.1 Q1.2 R4.2 R7.2 R15.1 S1.1 S3.2 X1.A1 X1.B1 XP1.5 XP2.4 XP2.5 Y1.2 | length 60.6
  Top Layer w0.2: v1(26.95,19.452) 26.95,19.615 27.231,19.895 27.231,20.656 DD1.47 ; v1(28,25.1) 28.631,25.731 29.306,25.731 DD1.8
  Top Layer w0.3: v1(2.052,6.369) 2.052,7.202 LED2.1 ; v1(5.5,6.4) LED1.1 ; v1(8.3,41) X1.B1 ; DA1.2 12.25,35.225 12.55,34.925 12.55,34.78 13.13,34.2 v1(14.3,34.2) ; IC2.4 14.065,5.873 15.373,5.873 v1(15.4,5.9) ; IC2.3 14.045,7.108 15.392,7.108 v1(15.4,7.1) ; IC2.2 14.045,8.393 15.393,8.393 v1(15.4,8.4) ; IC2.1 14.06,9.678 15.378,9.678 v1(15.4,9.7) ; v1(14.7,41) X1.A1 ; v1(15.2,22.3) 16.15,22.3 C5.1 ; v1(16.5,11.4) C16.1 ; v1(18.1,8.4) 18.107,8.393 19.455,8.393 IC2.7 ; v1(19.468,23) 19.603,23 19.853,22.75 DD1.35 ; C3.1 v1(20.4,35.1) ; DD1.23 22.75,28.05 v1(22.8,28) ; C10.1 v1(23.9,35) ; R15.1 v1(24,16.75) ; IC6.4 24.31,5.823 25.678,5.823 v1(25.7,5.8) ; v1(26.8,11.4) C18.1 ; v1(28.3,5.9) 28.327,5.873 29.684,5.873 IC6.5 ; v1(28.3,7.1) 28.307,7.108 29.705,7.108 IC6.6 ; v1(28.3,8.4) 28.307,8.393 29.704,8.393 IC6.7 ; v1(32.4,5.9) 32.428,5.873 33.76,5.873 IC5.4 ; v1(35.2,47.3) 35.2,48.425 S1.1 ; C1.1 36.3,39.25 v1(36.3,38.4) ; v1(36.4,12) C20.1 ; C14.1 v1(37.3,20.5) ; C19.1 v1(38.4,4) ; v1(38.6,22.4) Y1.2 ; R4.2 v1(39.5,38) ; Q1.2 41.175,21.575 42.225,21.575 v1(42.25,21.6) ; v1(46.2,12.5) IC3.1 ; IC3.7 46.85,11.793 47.2,12.143 v1(47.2,12.2) ; v1(47.5,17.5) C6.1 ; C15.1 v1(49.3,6.5) ; C17.1 48.35,8.8 v1(49.3,8.8)
  Top Layer w0.4: IC1.1 1.75,19.826 v1(1.75,18.25) ; v1(3,42.4) 3.75,42.4 C8.1 ; IC1.3 4.25,19.826 v1(4.25,17.5) R7.2 ; v1(8.75,1.75) S3.2 ; v1(19.5,43.25) C13.2 ; v1(22,42.75) 22.025,42.775 22.025,43.825 PS1.1 ; v1(26.5,15) C4.1 ; C12.2 v1(26.5,47.5) ; v1(29,15) C11.1 ; LED3.1 v1(29.75,49) ; C7.1 34.1,22.3 34.2,22.2 v1(35.2,22.2) ; C9.1 34.1,26.3 v1(35.1,26.3)
I2C1_SCL: DD1.42 R19.2 | length 8
  Top Layer w0.2: R19.2 19,19.483 19.242,19.725 24.436,19.725 24.731,20.019 24.731,20.656 DD1.42
I2C1_SDA: DD1.43 IC2.5 IC6.1 R18.2 | length 34.1
  Top Layer w0.2: IC2.5 21.045,5.845 21.5,6.3 21.5,14.5 21.4,14.6 20.9,14.6 20.4,15.1 20.4,19.183 20.517,19.3 21.5,19.3 ; R18.2 21.5,19.3 ; IC6.1 22.745,9.655 22.7,9.7 22.7,19.3 ; DD1.43 25.231,20.656 25.231,19.954 24.577,19.3 22.7,19.3 ; 21.5,19.3 22.7,19.3
I2C2_SCL: DD1.21 R17.2 XP2.2 | length 11.9
  Top Layer w0.3: DD1.21 23.75,30.089 26,32.339 26,35.25 26.25,35.5 27.54,35.5 ; R17.2 27.54,34.14 27.54,35.5 ; XP2.2 27.54,35.5
I2C2_SDA: DD1.22 R16.2 XP2.1 | length 17.2
  Top Layer w0.3: DD1.22 23.25,30.65 v1(23.3,30.7) ; v1(28.8,35.5) 30.2,35.5 ; XP2.1 30.2,37.38 30.2,35.5 ; R16.2 31.4,35.324 31.224,35.5 30.2,35.5
  Bottom Layer w0.3: v1(23.3,30.7) 28.1,30.7 28.8,31.4 v1(28.8,35.5)
NetDD1_44: DD1.44 R15.2 | length 3.7
  Top Layer w0.2: R15.2 24,18.783 24.117,18.9 24.743,18.9 25.731,19.888 25.731,20.656 DD1.44
NetIC1_2: IC1.2 R7.1 | length 2.4
  Top Layer w0.4: R7.1 2.96,17.5 IC1.2
NetIC1_6: IC1.6 R11.2 | length 9.3
  Top Layer w0.4: IC1.6 4.24,25.26 4.24,26.74 v1(4.25,26.75) ; R11.2 v1(8.5,24.5)
  L2 (GND) w0.4: v1(4.25,26.75) 8.25,26.75 8.5,26.5 v1(8.5,24.5)
NetIC1_7: IC1.7 R12.2 | length 14.4
  Top Layer w0.4: IC1.7 2.98,25.27 2.98,26.73 v1(3,26.75) ; R12.2 v1(11,24.5)
  L2 (GND) w0.4: v1(3,26.75) 4,27.75 10.766,27.75 11,27.516 v1(11,24.5)
NetIC6_3: IC6.3 R20.2 | length 7.4
  Top Layer w0.3: IC6.3 24.273,7.1 23.076,7.1 22.9,6.924 22.9,4.176 23.076,4 R20.2
NetLED1_2: LED1.2 R2.2 | length 2
  Top Layer w0.3: LED1.2 R2.2@5.5,11.15
NetLED2_2: LED2.2 R3.2 | length 2
  Top Layer w0.3: LED2.2 R3.2@2.1,11.15
NetLED3_2: LED3.2 R6.2 | length 2.2
  Top Layer w0.4: R6.2 LED3.2
NetLED4_1: LED4.1 R11.1 | length 1.7
  Top Layer w0.4: LED4.1 R11.1
NetLED5_1: LED5.1 R12.1 | length 1.7
  Top Layer w0.4: LED5.1 R12.1
NetQ1_3: Q1.3 R9.1 | length 2.8
  Top Layer w0.3: Q1.3 R9.1
NetR1_2: R1.2 S1.2 | length 5.1
  Top Layer w0.2: R1.2 34.2,39.4 34.2,42.1 35.25,43.15 S1.2
NetR4_1: R4.1 R5.2 S2.1 | length 7
  Top Layer w0.2: R4.1 40.5,39.35 ; S2.1 41.2,43.975 41.2,42.2 40.5,41.5 40.5,39.35 ; R5.2 40.5,39.35
NetR8_1: R8.1 R9.2 R10.1 | length 5
  Top Layer w0.3: R8.1 48.296,20.004 48.296,22.496 R9.2 48.296,22.504 48.296,24.996 R10.1
NetR13_1: R13.1 R14.2 VT1.1 | length 4.9
  Top Layer w0.4: VT1.1 9.45,31.25 R13.1 R14.2
NetR14_1: R14.1 S3.1 | length 29.6
  Top Layer w0.4: v1(6.3,33.6) 7.3,33.6 R14.1 ; S3.1 v1(8.75,9)
  Bottom Layer w0.4: v1(6.3,33.6) 5.462,32.762 5.462,17.58 4.7,16.819 4.7,13.3 8.568,9.432 8.568,9.29 8.75,9.108 v1(8.75,9)
NRST: C1.2 DD1.7 R1.1 | length 17.3
  Top Layer w0.2: DD1.7 29.344,25.269 v1(30.831,25.269) ; R1.1 34.3,37.2 35.275,37.2 ; v1(35.3,35.9) 35.275,35.925 35.275,37.2 ; C1.2 35.275,37.2
  Bottom Layer w0.2: v1(30.831,25.269) 30.831,27.131 35.3,31.6 v1(35.3,35.9)
OSC_IN: DD1.5 Y1.1 | length 7.4
  Top Layer w0.2: DD1.5 30.184,24.25 30.834,23.6 36.375,23.6 Y1.1
OSC_OUT: DD1.6 Y1.3 | length 10.2
  Top Layer w0.2: DD1.6 30.25,24.75 31,24 35.276,24 35.676,24.4 37.5,24.4 38.475,25.375 Y1.3
SPI1_CS: DD1.14 IC3.2 IC5.1 | length 47.7
  Top Layer w0.2: DD1.14 27.25,28.375 27.655,27.97 v1(27.655,27.945) ; IC5.1 33.743,9.7 32.417,9.7 32.3,9.817 32.3,14.3 33.5,15.5 37.968,15.5 38.2,15.732 v1(38.2,16.9) 38.7,17.4 41.569,17.4 43.784,15.184 43.784,13.717 44.101,13.4 45.4,13.4 45.9,13.9 45.9,14.183 46.017,14.3 46.583,14.3 46.85,14.033 IC3.2
  Bottom Layer w0.2: v1(27.655,27.945) 27.54,27.83 27.54,27.35 26.126,25.936 26.126,25.771 27.7,24.197 27.7,22.3 30.8,19.2 35.9,19.2 v1(38.2,16.9)
SPI1_MISO: DD1.16 IC3.3 IC5.5 | length 49.5
  Top Layer w0.2: v1(25.6,27.5) 26.25,28.15 DD1.16 ; v1(36.2,16.9) 36.2,17.9 36.5,18.2 41.9,18.2 45.2,14.9 47.383,14.9 47.5,14.783 IC3.3 ; v1(36.4,5.9) 39.157,5.9 IC5.5
  Bottom Layer w0.2: v1(25.6,27.5) 25.6,26.766 25.3,26.466 25.3,25.466 26.9,23.866 26.9,21.966 30.466,18.4 34.7,18.4 v1(36.2,16.9) 36.2,13.7 35.7,13.2 35.7,6.6 v1(36.4,5.9)
SPI1_MISO: DD1.17 IC3.5 IC5.2 | length 53.9
  Top Layer w0.2: v1(24.5,27.5) 25.2,28.2 25.491,28.2 25.75,28.459 DD1.17 ; IC5.2 32.115,8.385 31.9,8.6 31.9,14.5 33.3,15.9 34.9,15.9 35.105,16.105 35.105,16.805 v1(35.2,16.9) 35.2,18.183 35.617,18.6 42.066,18.6 42.366,18.3 42.4,18.3 45.4,15.3 48.983,15.3 49.1,15.183 49.1,12.1 48.8,11.8 48.278,11.8 48.15,11.672 IC3.5
  Bottom Layer w0.2: v1(24.5,27.5) 24.5,25.7 26.5,23.7 26.5,21.8 30.3,18 34.2,18 35.2,17 v1(35.2,16.9)
SPI1_SCK: DD1.15 IC3.4 IC5.6 | length 46.8
  Top Layer w0.2: v1(26.7,27.5) 26.75,27.55 DD1.15 ; v1(37.2,16.9) 37.2,17.683 37.317,17.8 41.734,17.8 44.817,14.717 44.817,14.117 v1(44.8,14.1) ; v1(37.3,7.1) 39.197,7.1 IC5.6 ; v1(48.1,14.2) 48.125,14.175 48.125,13.275 IC3.4
  Bottom Layer w0.2: v1(26.7,27.5) 26.7,27.3 25.7,26.3 25.7,25.631 27.3,24.031 27.3,22.131 30.616,18.816 30.65,18.816 30.666,18.8 35.3,18.8 v1(37.2,16.9) 37.3,16.8 v1(37.3,7.1) ; v1(44.8,14.1) 44.9,14.2 v1(48.1,14.2)
SWCLK: DD1.37 XP1.2 | length 34.4
  Top Layer w0.2: DD1.37 22.25,21.148 22.204,21.194 22.148,21.194 22,21.342 22,23.1 23,24.1 24.2,24.1 24.6,23.7 v1(24.6,22.9) ; v1(42.2,33.4) 47.53,33.4 47.63,33.3 XP1.2
  L2 (GND) w0.2: v1(24.6,22.9) 24.6,23.062 25,23.462 25,23.69 34.71,33.4 v1(42.2,33.4)
SWDIO: DD1.34 XP1.1 | length 31.4
  Top Layer w0.2: DD1.34 21.55,23.25 22.8,24.5 24.6,24.5 v1(25.7,23.4) ; v1(42.2,30.8) 47.67,30.8 XP1.1
  L2 (GND) w0.2: v1(25.7,23.4) 25.783,23.483 25.783,23.907 32.676,30.8 v1(42.2,30.8)
SWO: DD1.39 XP1.3 | length 32.3
  Top Layer w0.2: DD1.39 23.25,21.202 23.3,21.252 23.3,21.361 23.6,21.661 v1(23.6,23.3) ; v1(42.2,34.5) 46.01,34.5 47.61,36.1 XP1.3
  L2 (GND) w0.2: v1(23.6,23.3) 23.715,23.415 24.115,23.415 27.945,27.245 28.355,27.655 35.2,34.5 v1(42.2,34.5)
USB_IN_N: DA1.1 X1.B7 | length 7.8
  Top Layer w0.3: X1.B7 12.25,41.63 12.045,41.425 11.926,41.425 11.75,41.249 11.75,39.45 12.4,38.8 12.546,38.654 12.546,37.288 12.5,37.241 12.5,36.551 12.676,36.375 12.695,36.375 12.9,36.17 12.9,36.025 13.2,35.725 DA1.1
USB_IN_P: DA1.3 X1.B6 | length 7.8
  Top Layer w0.3: X1.B6 10.75,41.63 10.955,41.425 11.074,41.425 11.25,41.249 11.25,39.243 12.046,38.446 12.046,37.495 12,37.448 12,36.551 11.824,36.375 11.805,36.375 11.6,36.17 11.6,36.025 11.3,35.725 DA1.3
USB_OUT_N: DA1.6 DD1.32 | length 15.7
  Top Layer w0.3: DA1.6 13.19,32.806 12.9,32.516 12.9,32.361 12.695,32.156 12.664,32.156 12.488,31.98 12.488,30.912 13.2,30.2 13.973,29.427 15.1,28.3 15.1,24.426 15.276,24.25 DD1.32
USB_OUT_P: DA1.4 DD1.33 | length 16.5
  Top Layer w0.3: DA1.4 11.3,32.825 11.6,32.525 11.6,32.361 11.805,32.156 11.813,32.156 11.988,31.98 11.988,30.705 13.009,29.684 13.766,28.927 14.6,28.093 14.6,24.219 15.069,23.75 DD1.33
USER_LED1: DD1.29 R3.1 | length 27.3
  Top Layer w0.3: R3.1@2.1,13.351 2.1,14.224 2.926,15.05 6.55,15.05 v1(6.575,15.025) ; v1(19,25.8) 19.05,25.75 DD1.29
  Bottom Layer w0.3: v1(6.575,15.025) 8.579,15.025 13.6,20.046 13.6,25.231 14.169,25.8 v1(19,25.8)
USER_LED2: DD1.31 R2.1 | length 23.8
  Top Layer w0.3: R2.1 v1(5.5,14.3) ; v1(18,25.05) 19.668,25.05 19.968,24.75 DD1.31
  Bottom Layer w0.3: v1(5.5,14.3) 5.525,14.275 8.536,14.275 14.1,19.839 14.1,25.024 17.974,25.024 v1(18,25.05)
pads on no net: DD1.2 DD1.3 DD1.4 DD1.12 DD1.13 DD1.19 DD1.20 DD1.25 DD1.26 DD1.27 DD1.28 DD1.30 DD1.40 DD1.41 DD1.45 DD1.46 IC1.9 IC2.6 IC4.2 IC4.3 IC6.2 X1.A5 X1.A6 X1.A7 X1.A8 X1.B5 X1.B8 X1.MH

## Polygon pours and split planes (outlines as drawn)
GND on L2 (GND) "Top Layer-No Net" (solid, pour order 1): 2.5,0 cw(c2.5,2.5) 0,2.5 0,47.5 cw(c2.5,47.5) 2.5,50 47.5,50 cw(c47.5,47.5) 50,47.5 50,2.5 cw(c47.5,2.5) 47.5,0
3V3 on L3 (PWR) "L2 (GND)-No Net" (solid, pour order 2): 2.5,0 cw(c2.5,2.5) 0,2.5 0,47.5 cw(c2.5,47.5) 2.5,50 47.5,50 cw(c47.5,47.5) 50,47.5 50,2.5 cw(c47.5,2.5) 47.5,0
GND on Top Layer "L2 (GND)-No Net1" (solid, pour order 3): 2.5,0 cw(c2.5,2.5) 0,2.5 0,47.5 cw(c2.5,47.5) 2.5,50 47.5,50 cw(c47.5,47.5) 50,47.5 50,2.5 cw(c47.5,2.5) 47.5,0
GND on Bottom Layer "Top Layer-No Net1" (solid, pour order 4): 2.5,0 cw(c2.5,2.5) 0,2.5 0,47.5 cw(c2.5,47.5) 2.5,50 47.5,50 cw(c47.5,47.5) 50,47.5 50,2.5 cw(c47.5,2.5) 47.5,0

## Silkscreen, mask and mechanical layers (free items; w line width, h text height)
Top Overlay:
  text "GND" at 45.8,40.85 h1 r90
  text "3V3" at 45.8,38.5 h1 r90
  text "SWO" at 45.8,35.65 h1 r90
  text "SWCLK" at 45.8,31.75 h1 r90
  text "SWDIO" at 45.8,27.85 h1 r90
  text "REV 2.0 (27.04.2022)" at 17.5,0.5 h1.5
Bottom Overlay:
  text "https://github.com/k0v4back" at 35,0.5 h1.5
Border:
  the board outline again, w0.2